# Altium PCB PCB4.PcbDoc
Units mm, origin at the board's own origin, x right, y up, seen from the top; angles counter-clockwise.
Board outline 75 x 75 mm, 2 copper layers (Top Layer, Bottom Layer); 69 components, 65 nets, 247 pads, 60 vias.
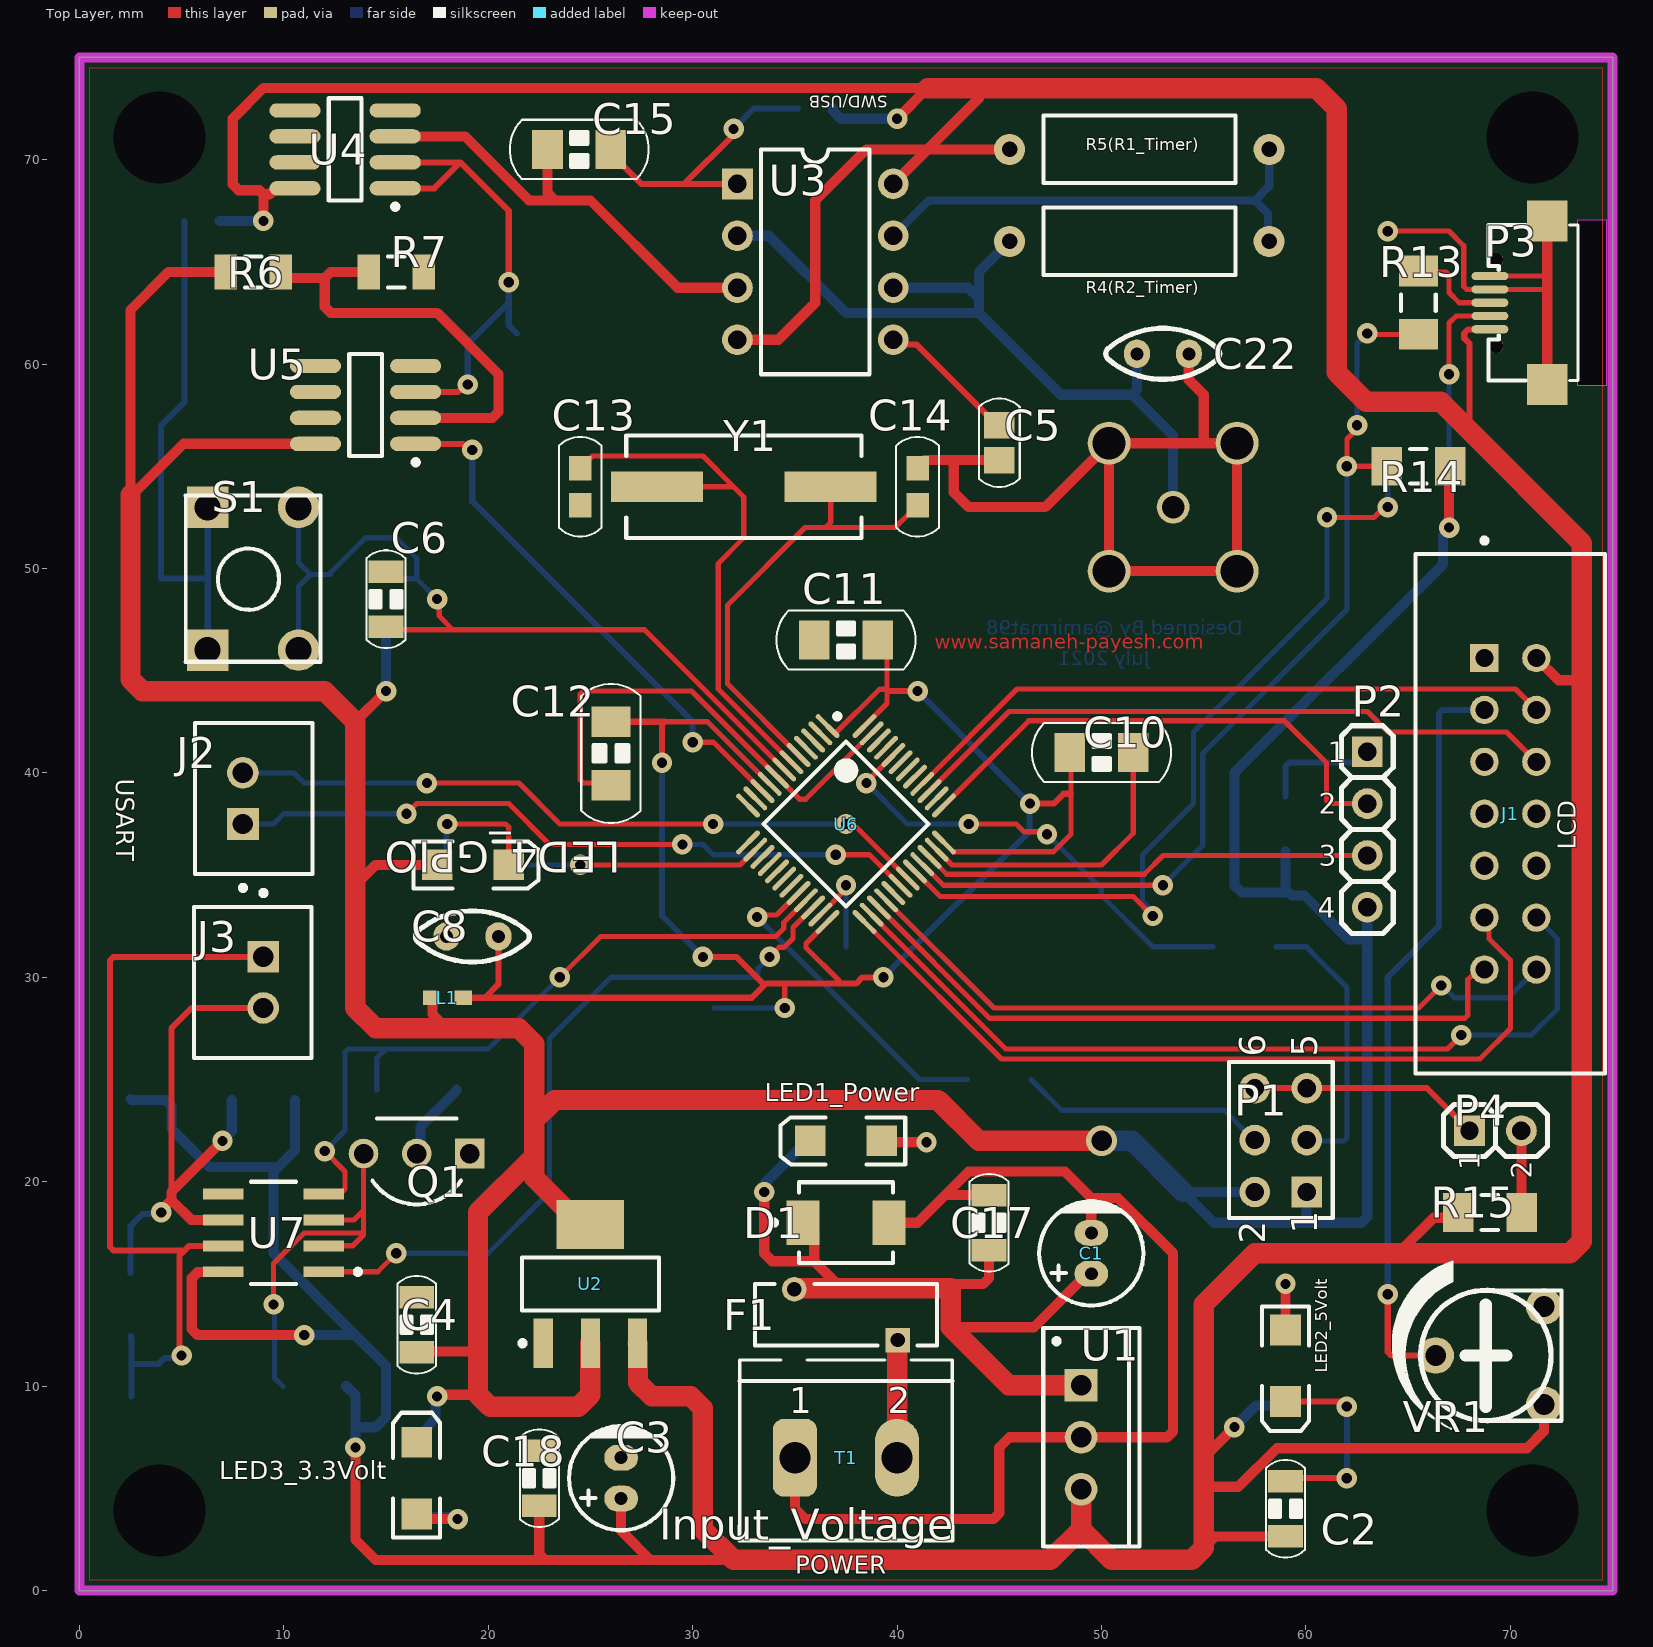
[diagram p0: Top Layer view]
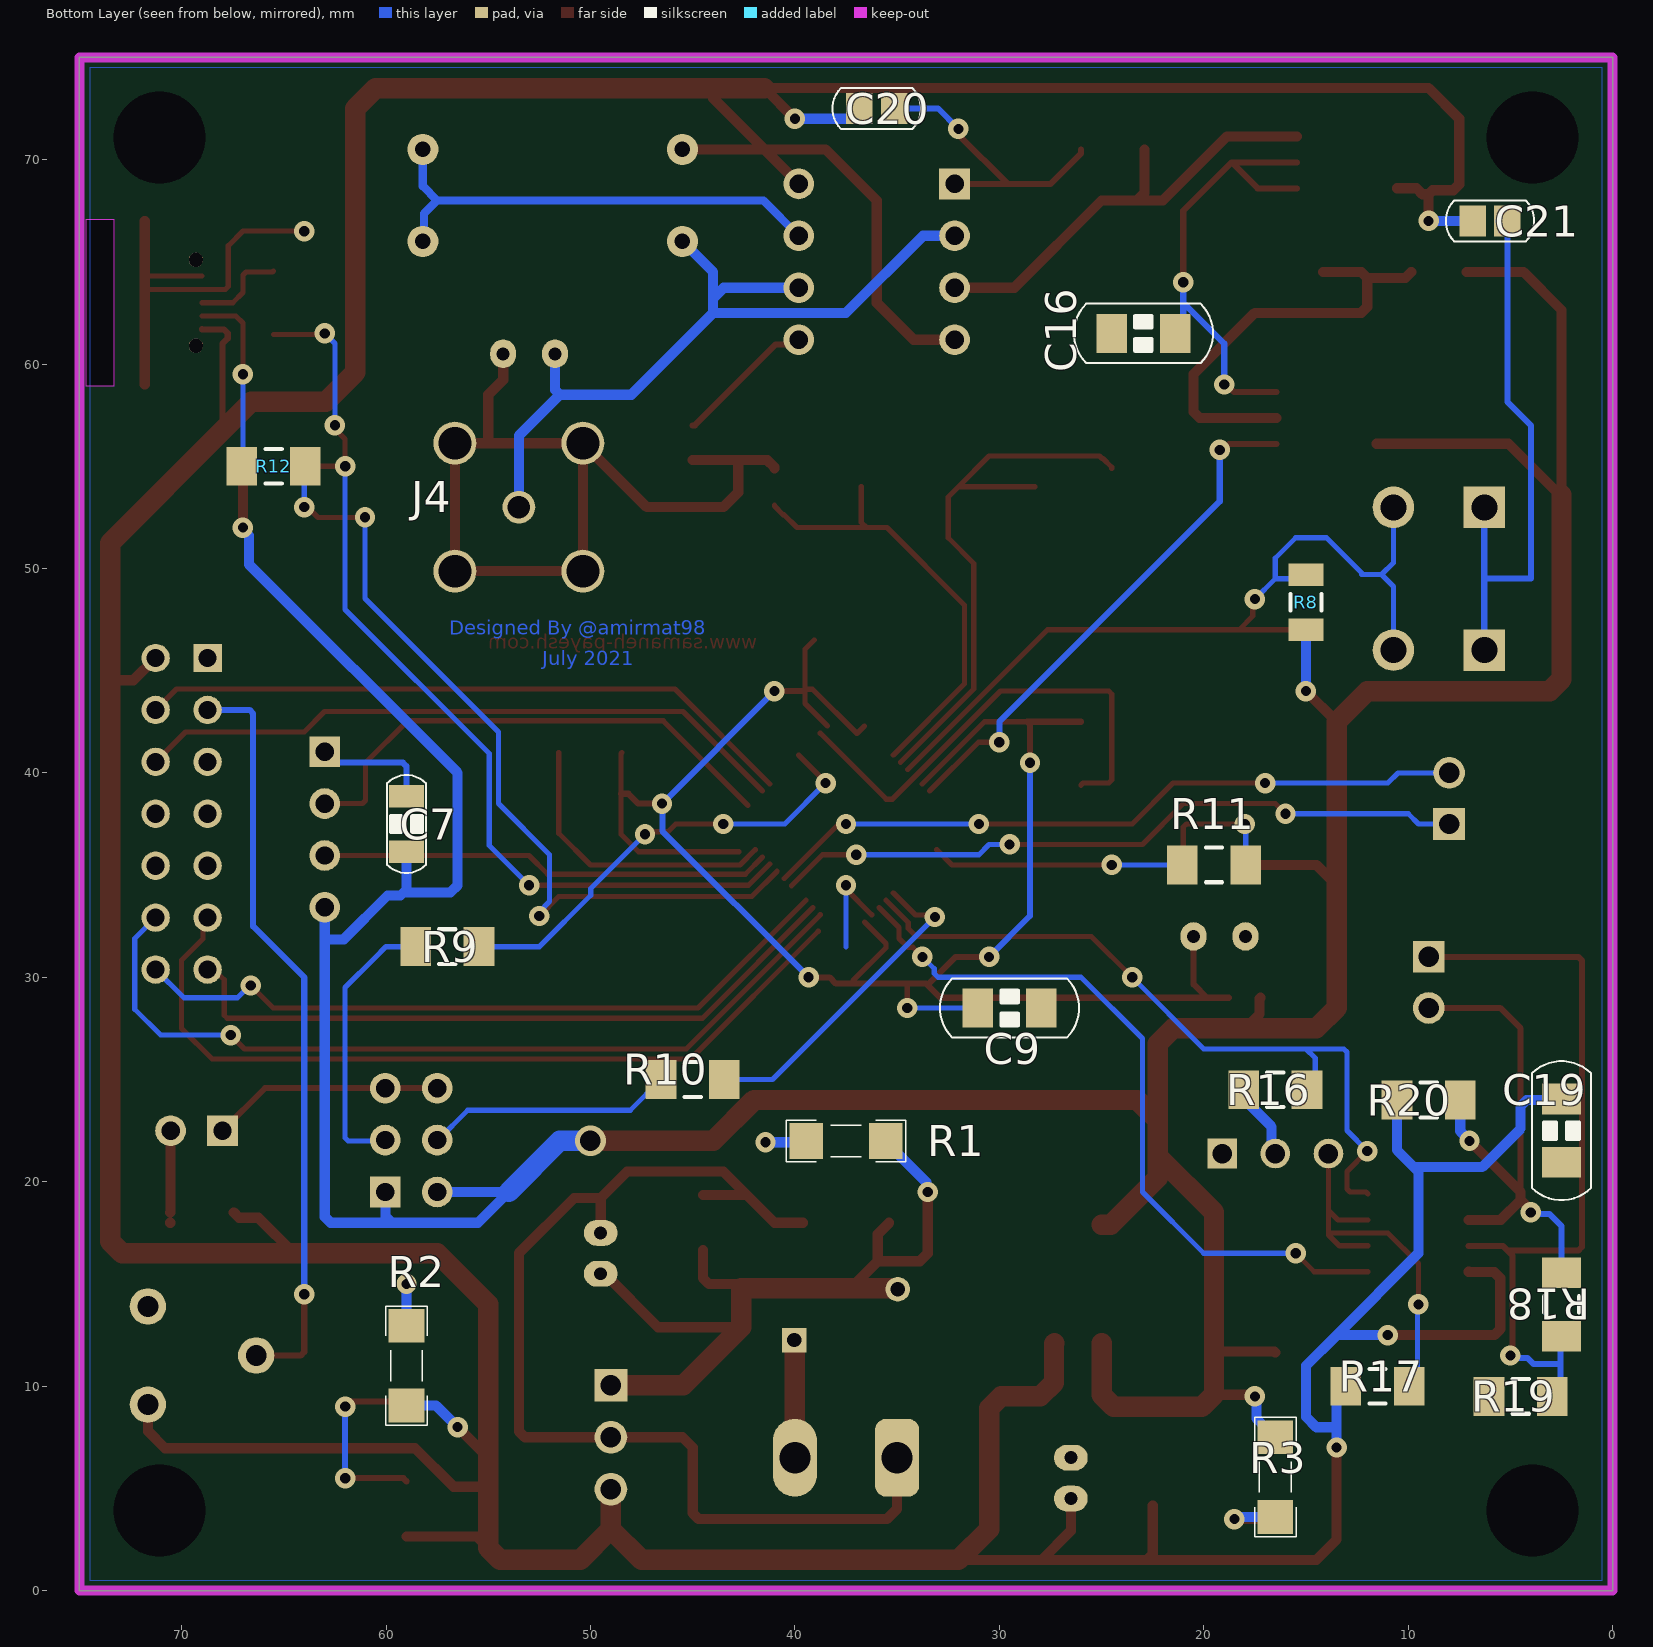
[diagram p1: Bottom Layer view, seen from below]

## Layer stack, top to bottom
Top Solder: solder mask 0.0102, Solder Resist, Dk 3.5
Top Layer: signal copper 0.0356
Dielectric 1: dielectric 0.32, FR-4, Dk 4.8
Bottom Layer: signal copper 0.0356
Bottom Solder: solder mask 0.0102, Solder Resist, Dk 3.5

## Board outline
0,0 75,0 75,75 0,75

## Design rules (kind name [scope] priority, off if disabled: settings)
BoardOutlineClearance [All] p1: gap=0.254 ignorepadtopadclearanceinfootprint=FALSE except(0: Arc-SplitContinuation Track-SplitContinuation SMDPad-SplitContinuation THPad-SplitContinuation Via-SplitContinuation Fill-SplitContinuation Poly-SplitContinuation Region-SplitContinuation Text-SplitContinuation)
Clearance Clearance_1 [InNamedPolygon('NONET_L01_P000') Or InNamedPolygon('NONET_L02_P001')] p1: gap=0.4 ignorepadtopadclearanceinfootprint=FALSE
Clearance [All] p2: gap=0.2 ignorepadtopadclearanceinfootprint=TRUE
HoleSize [All] p1: absolutevalues=TRUE maxlimit=5 minlimit=0.5 maxpercent=80.000 minpercent=20.000
HoleToHoleClearance [All] p1: gap=0.3 allowstackedmicrovias=TRUE
MinimumAnnularRing [All] p1: minimumring=0.2
MinimumSolderMaskSliver [All] p1: minsoldermaskwidth=0.3
PolygonConnect [All] p1: thpad.connectstyle=Relief thpad.reliefconductorwidth=0.254 thpad.reliefentries=4 thpad.polygonreliefangle="90 Angle" thpad.airgapwidth=0.254 smdpad.connectstyle=Relief smdpad.reliefconductorwidth=0.254 smdpad.reliefentries=4 smdpad.polygonreliefangle="90 Angle" smdpad.airgapwidth=0.254 via.connectstyle=Direct via.reliefconductorwidth=0.254 via.reliefentries=4 via.polygonreliefangle="90 Angle" via.airgapwidth=0.254
RoutingVias [All] p1: holewidth=0.5 width=1 viastyle="Through Hole" minholewidth=0.4 minwidth=0.8 maxholewidth=1.2 maxwidth=2
SolderMaskExpansion [All] p1: expansion=0.102 istentingtop=FALSE
UnRoutedNet [All] p1: checkbadconnections=TRUE
Width [All] p1: maxlimit=1 minlimit=0.254 preferedwidth=0.5
26 further rules are at their usual default settings.

## Classes and differential pairs
component class Timer555_D: C5 C15 C16 C20 C21 C22 J4 R4(R2_Timer) R5(R1_Timer) R6 R7 U3 U4 U5
component class Power_D: C1 C2 C3 C4 C17 C18 D1 F1 LED1_Power LED2_5Volt LED3_3.3Volt R1 R2 R3 T1 U1 U2
component class MCU_D: C6 C7 C8 C9 C10 C11 C12 C13 C14 C19 J2 J3 L1 LED4_GPIO P1 P2 P3 Q1 R8 R9 R10 R11 R12 R13 R14 R16 R17 R18 R19 R20 S1 U6 U7 Y1
component class LCD_D: J1 P4 R15 VR1

## Components (designator, comment, footprint, x,y, rotation, side; value= is the part's Value field where it differs from the comment)
C1 "1000uF" "cap 01" 49.5,16.5 r270 top
C2 "100nF" "CAPC3216L (1206)" 59,4 r90 top
C3 "4.7uF" "cap 01" 26.5,5.5 r270 top
C4 "100nF" "CAPC3216L (1206)" 16.5,13 r90 top
C5 "10nF" "CAPC2012N (0805)" 45,56.15 r90 top
C6 "1uF" "CAPC3216L (1206)" 15,48.5 r90 top
C7 "100nF" "CAPC3216L (1206)" 59,37.5 r90 bottom
C8 "1uF" "Cap - 100nF" 19.23,32 r180 top
C9 "100nF" "CAPC3216M (1206)" 29.5,28.5 r180 bottom
C10 "100nF" "CAPC3216M (1206)" 50,41 r0 top
C11 "100nF" "CAPC3216M (1206)" 37.5,46.5 r180 top
C12 "100nF" "CAPC3216M (1206)" 26,40.95 r270 top
C13 "20pF" "CAPC1608M (0603)" 24.5,54 r270 top
C14 "20pF" "CAPC1608M (0603)" 41,54 r90 top
C15 "1nF" "CAPC3216M (1206)" 24.45,70.5 r180 top
C16 "1uF" "CAPC3216M (1206)" 22.95,61.5 r0 bottom
C17 "100nF" "CAPC3216L (1206)" 44.5,18 r90 top
C18 "100nF" "CAPC3216L (1206)" 22.5,5.5 r90 top
C19 "100nF" "CAPC3216M (1206)" 2.5,22.5 r90 bottom
C20 "100nF" "CAPC2012N (0805)" 36,72.5 r180 bottom
C21 "100nF" "CAPC2012N (0805)" 6,67 r180 bottom
C22 "3.3nF" "Cap - 100nF" 53,60.5 r180 top
D1 "SM6T6V8A" STMicroelectronics_SM6T6V8A_0 37.5,18 r0 top
F1 "RUEF160" Littelfuse_RUEF160 37.5,13.5 r180 top
J1 "IDC Box Header 2x7" FT_IDCBH2x7 70,38 r90 top locked
J2 "B2B-XH-A_LF_SN" JST_0_MFG 8.525,38.75 r90 top
J3 "B2B-XH-A_LF_SN" JST_0_MFG 8.475,29.75 r270 top
J4 "5-1634503-1" TECO-5-1634503-1_V 53.5,53 r180 bottom
L1 "742792645 (Ferrite Bead)" SMD-0603 18,29 r0 top
LED1_Power "Green" "LED SMD 1206" 37.5,22 r180 top
LED2_5Volt "Green" "LED SMD 1206" 59,11 r270 top
LED3_3.3Volt "Green" "LED SMD 1206" 16.5,5.5 r90 top
LED4_GPIO "Green" "LED SMD 1206" 19.25,35.5 r0 top
P1 "HDR_3X2" MISC_HDR_2X3 60.04,19.5 r90 top
P2 "MaleHDR_1X04" MHDR1X04-254P 63,41.04 r270 top
P3 "USB Connector" USB_AB_BM_SHS 70.5,63 r270 top
P4 "MHDR_1X02" MHDR1X02-254P 68,22.5 r0 top
Q1 "2N3904TF" ON_Semiconductor_135AR_MFG 16.5,21 r90 top
R1 "1K" RESC4817X04N 37.5,22 r0 bottom
R2 "560" RESC4817X04N 59,11 r90 bottom
R3 "560" RESC4817X04N 16.5,5.55 r270 bottom
R4(R2_Timer) "330K" Res-(1/2) 58.2,66 r180 top
R5(R1_Timer) "100K" Res-(1/2) 58.2,70.5 r180 top
R6 "1K" "RESC3216X60L (1206)" 8.5,64.5 r180 top
R7 "2.2K" "RESC3216X60L (1206)" 15.5,64.5 r180 top
R8 "10K" "RESC3216X60L (1206)" 15,48.35 r270 bottom
R9 "100K" "RESC3216X60M (1206)" 57,31.5 r0 bottom
R10 "100K" "RESC3216X60M (1206)" 45,25 r180 bottom
R11 "560" "RESC3216X60M (1206)" 19.5,35.5 r0 bottom
R12 "20" "RESC3216X60M (1206)" 65.5,55 r0 bottom
R13 "20" "RESC3216X60M (1206)" 65.5,63 r90 top
R14 "4.7K" "RESC3216X60M (1206)" 65.5,55 r180 top
R15 "330" "RESC3216X60M (1206)" 69,18.5 r180 top
R16 "10K" "RESC3216X60M (1206)" 16.5,24.5 r0 bottom
R17 "10K" "RESC3216X60M (1206)" 11.5,10 r0 bottom
R18 "120" "RESC3216X60M (1206)" 2.5,14 r90 bottom
R19 "20K" "RESC3216X60M (1206)" 4.5,9.5 r180 bottom
R20 "20K" "RESC3216X60M (1206)" 9,24 r0 bottom
S1 "Switch PB" "Switch - Push to On" 8.5,49.5 r90 top
T1 "Input_Voltage" "MSTBV 2,5/2-G-5" 37.5,6.5 r0 top
U1 "L7805CV" "TO-220 AB" 49,7.5 r270 top
U2 "AMS1117-3.3" SOT223-4N 25,15 r90 top
U3 "NE555P" P008 36,65 r270 top
U4 "LMV358M" M08A_M 13,70.5 r180 top
U5 "LMV358M" M08A_M 14,58 r180 top
U6 "STM32F101C8T6" LQFP48_L 37.5,37.5 r315 top locked
U7 "MAX485ECSA+" Maxim_Integrated_S8-5_MFG 9.5,17.5 r180 top
VR1 "5K" "Pot 00" 69,11.5 r90 top
Y1 "8 MHz" "Crystal SMD" 32.5,54 r180 top

## Footprints (in the part's own frame and the unit in brackets; to place one, negate y for a bottom-side part, rotate by r counter-clockwise, add the part's x,y. Pads: shape width x height; smd on the part's side, far side on the other; paste and mask are expansions set on the pad)
"cap 01" [mm]
  oval 1.27x1.651 hole 0.635: 1(1,0) 2(-1,0)
  silkscreen extent -2.55,-2.55 2.55,2.55, body extent -2.53,-2.53 2.53,2.53, height 12.54
"Cap - 100nF" [mil]
  oval 50x55 hole 25: 1(-50,0) 2(50,0)
  silkscreen extent -110,-49 110,49, body extent -115,-34 115,33, height 272
"CAPC1608M (0603)" [mm] "Chip Capacitor, Body 1.6x0.8mm, IPC Low Density"
  rect 1.2x1.1 smd: 1(-0.9,0) 2(0.9,0)
  silkscreen extent -2.43,-1.05 2.43,1.05, body extent -0.76,-0.38 0.76,0.38, height 0.6
"CAPC2012N (0805)" [mm] "Chip Capacitor, Body 2.0x1.3mm, IPC Medium Density"
  rect 1.3x1.5 smd: 1(-0.85,0) 2(0.85,0)
  silkscreen extent -2.16,-1 2.16,1, body extent -1.02,-0.63 1.02,0.64, height 0.65
"CAPC3216L (1206)" [mm] "Chip Capacitor, Body 3.2x1.6mm, IPC High Density"
  rect 1.1x1.7 smd: 1(-1.35,0) 2(1.35,0)
  silkscreen extent -2.39,-0.95 2.39,0.95, body extent -1.52,-0.76 1.52,0.76, height 0.75
"CAPC3216M (1206)" [mm] "Chip Capacitor, Body 3.2x1.6mm, IPC Low Density"
  rect 1.5x1.9 smd: 1(-1.55,0) 2(1.55,0)
  silkscreen extent -3.4,-1.45 3.4,1.45, body extent -1.52,-0.76 1.52,0.76, height 0.75
"Crystal SMD" [mm] "DESIGNER ABBAS BASEREH"
  rect 4.5x1.5 smd: 1(-4.25,0) 2(4.25,0)
  silkscreen extent -5.75,-2.5 5.75,2.5, body extent -6.21,-2.25 6.09,2.25, height 5.18
FT_IDCBH2x7 [mil]
  rect 54.69x54.69 hole 35 paste-39370.1 mask+0: 1(300,50)
  round 54.69 hole 35 paste-39370.1 mask+0: 2(300,-50) 3(200,50) 4(200,-50) 5(100,50) 6(100,-50) 7(0,50) 8(0,-50) 9(-100,50) 10(-100,-50) 11(-200,50) 12(-200,-50) 13(-300,50) 14(-300,-50)
  silkscreen extent -500,-183 531,183, body extent -504,-186 504,186, height 10
JST_0_MFG [mm]
  rect 1.55x1.55 hole 1 paste-1000 mask+0: 1(-1.25,0.525)
  round 1.55 hole 1 paste-1000 mask+0: 2(1.25,0.525)
  silkscreen extent -4.5,-2.88 3.7,2.88, body extent -3.8,-2.98 3.8,2.98, height 0.25
"LED SMD 1206" [mm]
  rect 1.5x1.5 smd: 1(-1.75,0) 2(1.75,0)
  silkscreen extent -2.9,-1.15 3.2,1.15, body extent -1.65,-0.76 1.65,0.69, height 1.36
Littelfuse_RUEF160 [mm]
  rect 1.2x1.2 hole 0.7 paste-1000 mask+0: 1(-2.525,1.245)
  round 1.2 hole 0.7 paste-1000 mask+0: 2(2.525,-1.245)
  silkscreen extent -4.45,-1.5 4.45,1.5, body extent -4.55,-1.94 4.55,1.94, height 0.25
LQFP48_L [mm] "Thin QFP, 48-Leads, Body 7x7mm, Pitch 0.5mm, IPC High Density"
  oval 1.55x0.25 smd: 1(-4.025,2.75) 2(-4.025,2.25) 3(-4.025,1.75) 4(-4.025,1.25) 5(-4.025,0.75) 6(-4.025,0.25) 7(-4.025,-0.25) 8(-4.025,-0.75) 9(-4.025,-1.25) 10(-4.025,-1.75) 11(-4.025,-2.25) 12(-4.025,-2.75) 25(4.025,-2.75) 26(4.025,-2.25) 27(4.025,-1.75) 28(4.025,-1.25) 29(4.025,-0.75) 30(4.025,-0.25) 31(4.025,0.25) 32(4.025,0.75) 33(4.025,1.25) 34(4.025,1.75) 35(4.025,2.25) 36(4.025,2.75)
  oval 0.25x1.55 smd: 13(-2.75,-4.025) 14(-2.25,-4.025) 15(-1.75,-4.025) 16(-1.25,-4.025) 17(-0.75,-4.025) 18(-0.25,-4.025) 19(0.25,-4.025) 20(0.75,-4.025) 21(1.25,-4.025) 22(1.75,-4.025) 23(2.25,-4.025) 24(2.75,-4.025) 37(2.75,4.025) 38(2.25,4.025) 39(1.75,4.025) 40(1.25,4.025) 41(0.75,4.025) 42(0.25,4.025) 43(-0.25,4.025) 44(-0.75,4.025) 45(-1.25,4.025) 46(-1.75,4.025) 47(-2.25,4.025) 48(-2.75,4.025)
  silkscreen extent -4.15,-2.85 2.85,3.55, body extent -3.5,-3.5 3.5,3.5, height 1.6
M08A_M [mm] "SOIC, 8-Leads, Body 4.9x3.9mm, Pitch 1.27mm, IPC Low Density"
  oval 2.5x0.7 smd: 1(-2.45,1.905) 2(-2.45,0.635) 3(-2.45,-0.635) 4(-2.45,-1.905) 5(2.45,-1.905) 6(2.45,-0.635) 7(2.45,0.635) 8(2.45,1.905)
  silkscreen extent -2.58,-2.5 0.8,2.93, body extent -2,-2.5 2,2.5, height 1.75
Maxim_Integrated_S8-5_MFG [mm]
  rect 1.98x0.53 smd paste+0 mask+0: 1(-2.465,1.905) 2(-2.465,0.635) 3(-2.465,-0.635) 4(-2.465,-1.905) 5(2.465,-1.905) 6(2.465,-0.635) 7(2.465,0.635) 8(2.465,1.905)
  silkscreen extent -4.25,-2.5 1.1,2.5, body extent -3.55,-2.75 3.55,2.75, height 0.25
MHDR1X02-254P [mm] "Male Header 1X02 with 2.54 mm Pitch"
  rect 1.5x1.5 hole 0.9: 1(0,0)
  round 1.5 hole 0.9: 2(2.54,0)
  silkscreen extent -1.27,-1.27 3.81,1.27, body extent -1.27,-1.27 3.81,1.27, height 8.43
MHDR1X04-254P [mm] "Male Header 1X04 with 2.54 mm Pitch"
  rect 1.5x1.5 hole 0.9: 1(0,0)
  round 1.5 hole 0.9: 2(2.54,0) 3(5.08,0) 4(7.62,0)
  silkscreen extent -1.27,-1.27 8.89,1.27, body extent -1.27,-1.27 8.89,1.27, height 8.43
MISC_HDR_2X3 [mm] "Connector; Header; 3x2 Position"
  rect 1.5x1.5 hole 0.9: 1(0,0)
  round 1.5 hole 0.9: 2(0,2.54) 3(2.54,0) 4(2.54,2.54) 5(5.08,0) 6(5.08,2.54)
  silkscreen extent -1.27,-1.27 6.35,3.81, body extent -1.27,-1.27 6.35,3.81, height 8.38
"MSTBV 2,5/2-G-5" [mil] "Header, Nominal current: 12 A Rated voltage (III/2): 320 V Number of positions: 2 Pitch: 5mm Color: green Contact surface: Tin Assembly: Soldering DESIGNER:ABBAS BASEREH"
  rrect50% 85x150 hole 60: 1(-98.43,0)
  oval 85x150 hole 60: 2(98.43,0)
  silkscreen extent -205,-159 205,188, body extent -197,-152 197,187, height 473
ON_Semiconductor_135AR_MFG [mm]
  rect 1.45x1.45 hole 0.95 paste-1000 mask+0: 1(0.38,-2.6)
  round 1.45 hole 0.95 paste-1000 mask+0: 2(0.38,0) 3(0.38,2.6)
  silkscreen extent -2.1,-2.16 2.09,2.16, body extent -2.19,-3.42 2.19,3.42, height 0.25
P008 [mm] "DIP; 8 Leads; Row Spacing 7.62 mm; Pitch 2.54 mm"
  rect 1.5x1.5 hole 0.9: 1(-3.81,-3.81)
  round 1.5 hole 0.9: 2(-1.27,-3.81) 3(1.27,-3.81) 4(3.81,-3.81) 5(3.81,3.81) 6(1.27,3.81) 7(-1.27,3.81) 8(-3.81,3.81)
  silkscreen extent -5.5,-2.65 5.5,2.65
"Pot 00" [mil]
  round 70 hole 40: 1(-94.49,-104.33) 2(94.49,-104.33) 3(0,104.33)
  silkscreen extent -141,-138 181,187, body extent -125,-144 127,145, height 183
Res-(1/2) [mil]
  round 60 hole 30: 1(0,0) 2(500,0)
  silkscreen extent 65,-65 435,65, body extent -12,-66 513,66, height 135
"RESC3216X60L (1206)" [mm] "Chip Resistor, Body 3.2x1.6x0.60 mm, IPC High Density"
  rect 1.1x1.7 smd: 1(-1.35,0) 2(1.35,0)
  silkscreen extent -0.4,-0.75 0.4,0.75, body extent -1.6,-0.8 1.6,0.8, height 0.6
"RESC3216X60M (1206)" [mm] "Chip Resistor, Body 3.2x1.6x0.60mm, IPC Low Density"
  rect 1.5x1.9 smd: 1(-1.55,0) 2(1.55,0)
  silkscreen extent -0.4,-0.85 0.4,0.85, body extent -1.6,-0.8 1.6,0.8, height 0.6
RESC4817X04N [mm] "Chip Resistor, 2-Leads, Body 4/80x1/70mm, IPC Medium Density-Design:Abbas Basereh"
  rect 1.65x1.75 smd: 1(-1.95,0) 2(1.95,0)
  silkscreen extent -2.92,-1.02 2.92,1.02, body extent -1.6,-0.8 1.6,0.8, height 1
SMD-0603 [mm] "Chip Inductor, 2-Leads, Body 1.6x0.8mm"
  rect 0.85x0.7 smd: 1(-0.775,0) 2(0.775,0)
  body extent -0.8,-0.4 0.8,0.4, height 0.95
SOT223-4N [mm] "SOT223, 4-Leads, Body 6.7x7.3mm (max), Pitch 2.30mm, IPC Medium Density"
  rect 2.4x0.95 smd: 1(-2.9,2.3) 2(-2.9,0) 3(-2.9,-2.3)
  rect 2.4x3.3 smd: 4(2.9,0)
  silkscreen extent -3.02,-3.35 1.3,3.45, body extent -3.48,-3.25 3.48,3.25, height 1.68
STMicroelectronics_SM6T6V8A_0 [mm]
  rect 1.62x2.18 smd paste+0 mask+0: 1(-2.11,0) 2(2.11,0)
  silkscreen extent -3.65,-1.97 2.3,1.97, body extent -3.02,-2.07 3.02,2.07, height 0.25
"Switch - Push to On" [mil]
  rect 80x80 hole 50: 1(-137.5,87.5) 1(137.5,87.5)
  round 80 hole 50: 2(-137.5,-87.5) 2(137.5,-87.5)
  silkscreen extent -160,-130 160,130, body extent -155,-121 157,123, height 205
TECO-5-1634503-1_V [mm] "THD, 5-Leads,Dia 11mm, Pitch 3.13mm"
  round 1.6 hole 1.1: 1(0,0)
  round 2.1 hole 1.6: 2(-3.13,3.13) 3(-3.13,-3.13) 4(3.13,-3.13) 5(3.13,3.13)
  body extent -5.5,-5.51 5.5,5.51, height 13.7
"TO-220 AB" [mm] "Epoxy meets UL94, V0-Design:Abbas Basereh"
  rect 1.6x1.6 hole 1: 1(-2.54,0)
  round 1.6 hole 1: 2(0,0) 3(2.54,0)
  silkscreen extent -5.35,-1.85 5.35,2.85, body extent -5.08,-1.65 5.08,2.92, height 18.54
USB_AB_BM_SHS [mm] "USB Micro AB - Standard (Bottom mount), Shell SMT DESIGNER ABBAS BASEREH"
  oval 0.4x1.8 smd: 1(1.3,-1.5) 2(0.65,-1.5) 3(0,-1.5) 4(-0.65,-1.5) 5(-1.3,-1.5)
  rect 2x2 smd: 6(-4,1.3) 6(4,1.3)
  round 0.7 hole 0.7: H(-2.1,-1.2) H(2.1,-1.2)
  Keep-Out Layer board cut-out: -4.064,2.8 -4.064,4.191 4.064,4.191 4.064,2.8
  silkscreen extent -3.8,-1.57 3.8,2.8, body extent -4,-1.88 4,4.16, height 2.75

## Part data
C1 C3: library part CAP_Polar, "Polar Capacitor"
C2 C4 C5 C6 C7 C8 C9 C10 C11 C12 C13 C14 C15 C16 C17 C18 C19 C20 C21: library part CAP_Bipolar, "Bipolar Capacitor"
C22: library part Cap-Bipolar, "Bipolar Capacitor"
D1: "TVS DIODE 5.8VWM 13.4VC SMB"
F1: "Littelfuse RUEF160----PTC Resettable Fuse 1.6A(hold) 3.2A(trip) 30V 100A 0.9W 8s 0.03Ohm Radial 8.9 X 3 X 15.2mm Bag"
J4: "Female Header, Pitch 3.13 mm, Height 13.7 mm, Tail Length 4.5 mm, -55 to 85 degC, RoHS, Bulk"
L1: library part 742792645, "SMD EMI Suppression Ferrite Bead WE-CBF, Z = 470 Ohm"
LED1_Power LED2_5Volt LED3_3.3Volt: library part LED
LED4_GPIO: library part LED, "LED"
P1: "Header, 3-Pin, Dual row"
P2: library part MHDR_1X04, "Male Header 1X04"
P3: library part "USB AB MICRO CONNECTOR", "USB MICRO-B Type Connector"
P4: "Male Header 1X02"
R1 R2 R3: library part "RES 1206 0.25W", "RES 1206"
R4(R2_Timer) R5(R1_Timer) R6 R7 R8 R9 R10 R11 R12 R13 R14 R15 R16 R17 R18 R19 R20: library part RES, "Resistor"
S1: "Push Button Switch"
T1: library part CON_Phoenix_MSTBV_02, "2 Pitch: 5 mm Color: green Contact surface: Tin Assembly"
U1: library part "L7805CV-Linear Voltage Regulator IC Positive 1 Output 5V 1.5A TO-220AB", "Linear Voltage Regulator IC Positive FIXED"
U2: library part IC_AMS1117-3.3, "800mA LOW DROPOUT VOLTAGE REGULATOR"
U3: "Precision Timer"
U4 U5: "General Purpose, Low Voltage, Rail-to-Rail Output Operational Amplifiers, 8-pin Narrow SOIC"
U6: "STM32 ARM-based 32-bit MCU with 64 Kbytes Flash, 48-pin LQFP, Industrial Temperature"
VR1: library part "Resistor Variable", "Variable Resistor"
Y1: library part XTAL_Crystal, "XTAL Crystal"

## Free pads (board coordinates)
  round 1.524 hole 4.5: M4(3.91,3.91) M4(3.91,71.09) M4(71.09,3.91) M4(71.09,71.09)

## Via types
v1: diameter 1, hole 0.5, Top Layer to Bottom Layer, 59 vias
v2: diameter 1.5, hole 1, Top Layer to Bottom Layer, 1 vias

## Nets (pads, with @x,y where several pads share a name; then routed paths per layer and width w, separated by ;. In a path a pad name is that pad's centre, name@x,y a point inside that pad or via, vN(x,y) a via of type N, cw(c..) or ccw(c..) an arc to the next point about the centre after c; other vN are vias at no path point)
+3.3V: C4.1 C7.1 L1.1 LED4_GPIO.1 P1.1 P1.2 P2.4 R3.1 R6.2 R8.2 R14.1 U2.2 U2.4 U5.8 | length 217.9
  Top Layer w0.5: R6.2 4.356,64.5 2.5,62.644 2.5,53.615 2.615,53.615 5.095,56.095 U5.8 ; 13.5,34.5 14.5,35.5 LED4_GPIO.1 ; 13.5,42.5 v1(15,44) ; C4.1 16.546,11.696 19.5,11.696 ; L1.1 17.269,28.956 17.269,28.209 17.978,27.5 ; v1(17.5,9.5) 17.586,9.586 19.5,9.586 ; v1(67,52) 67,54.95 R14.1
  Top Layer w1: 2.5,53.615 2.5,44.586 3.086,44 12,44 13.5,42.5 13.5,34.5 13.5,28.5 14.5,27.5 17.978,27.5 21.5,27.5 22.25,26.75 22.25,23.001 ; U2.2 25,9.586 24.414,9 20.086,9 19.5,9.586 19.5,11.696 19.5,18.5 22.25,21.25 ; U2.4 24.55,17.9 22.25,20.2 22.25,21.25 ; v2(50,22) 44,22 42,24 23.249,24 22.25,23.001 ; 22.25,21.25 22.25,23.001
  Bottom Layer w0.5: v1(15,44) R8.2 ; R3.1 16.55,7.5 17.125,8.075 17.125,8.125 17.423,8.423 17.423,9.423 v1(17.5,9.5) ; P1.2 54,19.5 55.5,18 59.727,18 ; C7.1 59,34.293 59.146,34.146 ; P1.1 60.02,19.48 60.02,18.293 59.727,18 ; P2.4 63,31.853 ; v1(67,52) 67,51.892 66.707,51.599 66.707,50.207 56.5,40 56.5,34.5 56.854,34.146 59.146,34.146 ; 59.146,34.146 59.293,34 59.927,34 62.073,31.853 63,31.853 ; 59.727,18 62.707,18 63,18.293 63,31.853
  Bottom Layer w1: v2(50,22) 51.5,22 54,19.5
+5V: C2.1 C3.1 C18.1 C19.2 C20.1 C21.1 J1.2 P3.1 R2.1 R5(R1_Timer).2 R15.2 R17.2 R20.2 U1.3 U2.3 U3.4 U3.8 U4.8 U7.8 VR1.1 | length 346.7
  Top Layer w0.3: 67.929,56.811 68,56.883 68,61 67.743,61.257 67.743,61.505 67.919,61.681 68.981,61.681 P3.1
  Top Layer w0.5: U7.8 7.02,15.58 5.793,15.58 5.5,15.287 5.5,12.793 5.793,12.5 v1(11,12.5) ; v1(9,67) 9,68.302 ; U4.8 9.596,68.595 9.303,68.302 9,68.302 ; v1(13.5,7) 13.5,2.5 14.5,1.5 22.793,1.5 ; C18.1 22.5,1.793 22.793,1.5 ; C3.1 26.5,2.923 27.923,1.5 ; 32,1.5 27.923,1.5 ; U3.4 34.19,61.19 36,63 36,68 38.5,70.5 41.5,70.5 ; U3.8 41.5,70.5 ; v1(40,72) 41.5,73.5 9,73.5 7.5,72 7.5,68.793 7.793,68.5 8.802,68.5 9,68.302 ; 44,73.5 44,73 41.5,70.5 ; 45.5,70.5 41.5,70.5 ; 55,2.086 55.564,2.65 C2.1 ; 55,5.079 56.693,5.079 58.582,6.968 70.814,6.968 71.639,7.793 71.639,9.089 VR1.1 ; 55,6.895 55.395,6.895 v1(56.5,8) ; 64.5,16.5 66.243,18.243 67.193,18.243 R15.2 ; J1.2 72.357,44.533 73.5,44.533 ; 22.793,1.5 27.923,1.5
  Top Layer w1: U2.3 27.325,12.075 27.325,10.175 28,9.5 29.914,9.5 30.5,8.914 30.5,3 32,1.5 47.5,1.5 49,3 ; 41.5,73.5 44,73.5 60.5,73.5 61.5,72.5 61.5,59.586 62.936,58.15 66.59,58.15 67.929,56.811 73.5,51.24 73.5,44.533 73.5,17.086 72.914,16.5 64.5,16.5 57.5,16.5 55,14 55,6.895 55,5.079 55,2.086 54.414,1.5 50.5,1.5 49,3 ; U1.3 49,3
  Bottom Layer w0.5: C19.2 2.55,24 4.207,24 4.5,23.707 4.5,22.6 6.384,20.716 9.716,20.716 ; C21.1 v1(9,67) ; R20.2 10.55,21.55 9.716,20.716 ; v1(11,12.5) 13.5,12.5 ; R17.2 13.5,9.55 13.5,7.988 ; v1(13.5,7) 13.5,7.988 ; C20.1 36.85,72.4 37.25,72 v1(40,72) ; v1(56.5,8) 57.55,9.05 R2.1 ; 9.716,20.716 9.5,20.5 9.5,16.5 13.5,12.5 ; 13.5,7.988 14.488,7.988 15,8.5 15,11 13.5,12.5
BOOT0: R9.1 U6.44 | length 22.4
  Top Layer w0.254: v1(38.5,39.5) 38.5,39.558 39.816,40.874 U6.44 ; v1(43.5,37.5) 45.825,37.5 46.202,37.124 47.213,37.124 v1(47.333,37.003)
  Bottom Layer w0.254: v1(38.5,39.5) 40.5,37.5 v1(43.5,37.5) ; v1(47.333,37.003) 49.988,34.348 49.988,34.012 52.5,31.5 R9.1
BOOT1: R10.2 U6.20 | length 16.1
  Top Layer w0.254: v1(33.15,32.95) 33.25,33.05 34.108,33.05 35.181,34.124 U6.20
  Bottom Layer w0.254: v1(33.15,32.95) 41.099,25 R10.2
Buffer_OUTPUT: C16.1 U4.1 U4.2 U5.3 | length 23.9
  Top Layer w0.3: U4.1 17.365,68.595 18.635,69.865 ; U4.2 18.635,69.865 ; U5.3 18.527,58.635 18.892,59 v1(19,59) ; v1(21,64) 21,67.5 18.635,69.865
  Bottom Layer w0.3: v1(19,59) 19,61 21,63 ; v1(21,64) 21,63 ; C16.1 21,61.9 21,63
GND: C1.2 C2.2 C3.2 C4.2 C5.1 C6.2 C7.2 C8.2 C9.2 C10.2 C11.2 C12.2 C13.2 C14.2 C15.1 C16.2 C17.2 C18.2 C19.1 C20.2 C21.2 C22.1 D1.2 J1.1 J1.5 J4.2 J4.3 J4.4 J4.5 LED1_Power.2 LED2_5Volt.2 LED3_3.3Volt.2 P1.5 P1.6 P2.1 P3.4 P3.5 P3.6 P4.1 Q1.1 R7.1 R19.1 S1.1 T1.1 U1.2 U2.1 U3.1 U4.4 U5.4 U6.8 U6.23 U6.35 U6.47 U7.5 VR1.2 | length 231.1
  Top Layer w0.254: C12.2 25.9,39.5 24.649,39.5 24.5,39.649 24.5,43.851 24.649,44 29.939,44 U6.8 35.224,38.715 35.533,38.715 U6.47 ; U6.23 37.5,34.318 v1(37.5,34.5) ; U6.35 42.682,35.5 50,35.5 51.55,37.05 C10.2 ; v1(64,66.5) 67,66.5 67.719,65.781 67.719,63.799 67.867,63.65 P3.4 71.781,63.65 71.8,63.631 ; P3.5 71.774,64.3
  Top Layer w0.3: C15.1 26,70.3 27.49,68.81 29.592,68.81 ; v1(32,71.5) 32,71.218 29.592,68.81 ; U3.1 29.592,68.81 ; P1.6 P1.5 65.92,24.58 P4.1 ; C2.2 59.15,5.5 v1(62,5.5) ; LED2_5Volt.2 61.75,9.25 v1(62,9)
  Top Layer w0.5: T1.1 35,4 35.5,3.5 44.707,3.5 45,3.793 45,7 45.5,7.5 U1.2 53.207,7.5 53.5,7.793 53.5,16.5 50.793,19.207 49.5,19.207 ; D1.2 41,18 42.35,19.35 ; C14.2 41,54.95 41.35,55.3 42.77,55.3 ; C17.2 42.35,19.35 ; C5.1 42.77,55.3 ; C1.2 49.5,19.207 ; C22.1 54.27,59.23 55,58.5 55,56.187 54.943,56.13 ; 71.774,64.3 71.8,64.274 ; P3.6@71.8,59 71.8,63.631 71.8,64.274 ; P3.6@71.8,67 71.8,64.274 ; 42.35,19.35 43.5,20.5 48.207,20.5 49.5,19.207 ; 42.77,55.3 42.77,53.73 43.5,53 47.24,53 J4.5 ; J4.5 54.943,56.13 ; J4.5 J4.4 J4.3 J4.2 54.943,56.13
  Bottom Layer w0.254: 37.5,31.5 v1(37.5,34.5)
  Bottom Layer w0.3: C21.2 5.15,58.15 4,57 4,49.5 6.278,49.5 ; S1.1@6.278,46.008 6.278,49.5 ; S1.1@6.278,52.993 6.278,49.5 ; v1(32,71.5) 33,72.5 C20.2 ; C7.2 59,40.324 59.176,40.5 62.46,40.5 P2.1 ; v1(62,5.5) v1(62,9)
NE555_OUTPUT: C15.2 U3.3 U4.3 | length 22.5
  Top Layer w0.5: U4.3 18.865,71.135 22,68 23.279,68 ; C15.2 22.9,68.379 23.279,68 ; U3.3 29.27,63.73 25,68 23.279,68
NetC1_1: C1.1 C17.1 D1.1 F1.2 R1.1 U1.1 | length 41.5
  Top Layer w0.5: v1(33.5,19.5) 33.5,16.5 33.89,16.11 35.95,16.11 ; D1.1 35.95,17.44 35.95,16.11 ; 37.277,14.783 35.95,16.11 ; 42.615,12.885 46.695,12.885 49.31,15.5 C1.1 ; 42.615,14.783 42.832,15 44.207,15 44.5,15.293 C17.1
  Top Layer w1: F1.2 35.013,14.783 37.277,14.783 42.615,14.783 42.615,12.885 45.46,10.04 U1.1
  Bottom Layer w0.5: v1(33.5,19.5) 33.577,19.577 33.577,19.977 35.55,21.95 R1.1
NetC5_2: C5.2 U3.5 | length 6.9
  Top Layer w0.3: U3.5 40.04,60.96 40.94,60.96 44.9,57 C5.2
NetC8_1: C8.1 C9.1 C10.1 C11.1 C12.1 L1.2 U6.1 U6.9 U6.24 U6.36 U6.48 | length 100
  Top Layer w0.254: 28.633,42.5 30.732,42.5 U6.9 ; v1(34.5,28.5) 34.5,29.693 ; U6.24 35.55,31.661 35.55,31.45 37.153,29.847 37.153,29.693 ; U6.1 36.967,41.922 36.97,41.922 39.141,44.094 39.5,44.094 ; U6.48 39.5,43.389 39.5,44.094 ; C11.1 39.5,46.05 39.5,44.094 ; U6.36@42.75,36.142 42.753,36.142 42.754,36.143 47.643,36.143 48.5,37 48.5,38.977 48.5,40.95 C10.1
  Top Layer w0.3: L1.2 19.841,29 ; C8.1 20.5,29.659 19.841,29 ; C12.1 28.633,42.5 28.5,42.367 v1(28.5,40.5) ; v1(30.5,31) 32.138,31 33.445,29.693 33.445,29.555 ; v1(39.33,30) 38.3,30 37.993,29.693 37.153,29.693 34.5,29.693 33.582,29.693 33.445,29.555 ; 39.5,44.094 39.594,44 v1(41,44) ; v1(46.5,38.5) 47.662,38.5 48.14,38.977 48.5,38.977 ; 19.841,29 32.889,29 33.445,29.555
  Bottom Layer w0.254: C9.1 v1(34.5,28.5)
  Bottom Layer w0.3: v1(28.5,40.5) 28.5,33 v1(30.5,31) ; v1(39.33,30) 46.483,37.154 46.483,38.483 v1(46.5,38.5) v1(41,44)
NetC22_2: C22.2 J4.1 R4(R2_Timer).2 U3.2 U3.6 | length 39.5
  Bottom Layer w0.5: U3.2 33.73,66.27 37.5,62.5 44,62.5 ; U3.6 43.477,63.73 44,63.207 ; 45.5,66 44,64.5 44,63.207 ; C22.2 51.73,58.73 51.5,58.5 ; J4.1 53.5,56.5 51.5,58.5 ; 44,62.5 48,58.5 51.5,58.5 ; 44,62.5 44,63.207
NetJ1_3: J1.3 VR1.3 | length 37
  Top Layer w0.3: v1(64,14.5) 64,11.676 64.176,11.5 VR1.3
  Bottom Layer w0.3: v1(64,14.5) 64,30 66.5,32.5 66.5,42.904 66.676,43.08 J1.3
NetJ3_1: J3.1 R18.1 R19.2 U7.7 | length 38.2
  Top Layer w0.3: v1(5,11.5) 4.9,11.6 4.9,16.4 5.133,16.633 ; U7.7 5.365,16.865 5.133,16.633 ; J3.1 1.676,31 1.5,30.824 1.5,16.808 1.676,16.633 5.133,16.633
  Bottom Layer w0.3: R18.1 2.55,12.4 2.55,11.087 ; R19.2@2.55,9.5 2.55,11.087 ; v1(5,11.5) 4.885,11.385 4.172,11.385 3.874,11.087 2.55,11.087
NetJ3_2: J3.2 R18.2 R20.1 U7.6 | length 26.8
  Top Layer w0.3: 4.5,19.5 4.5,27.5 5.5,28.5 J3.2
  Top Layer w0.5: v1(4,18.5) 4,18.608 4.5,19.108 ; v1(7,22) 4.5,19.5 4.5,19.108 ; U7.6 5.473,18.135 4.5,19.108
  Bottom Layer w0.3: R18.2 2.5,17.824 3.1,18.424 3.924,18.424 v1(4,18.5)
  Bottom Layer w0.5: v1(7,22) 7,22.028 7.45,22.478 R20.1
NetLED1_Power_1: LED1_Power.1 R1.2 | length 4.2
  Top Layer w0.5: LED1_Power.1 39.313,21.937 v1(41.437,21.937)
  Bottom Layer w0.5: R1.2 39.513,21.937 v1(41.437,21.937)
NetLED2_5Volt_1: LED2_5Volt.1 R2.2 | length 4.3
  Top Layer w0.5: LED2_5Volt.1 v1(59,15)
  Bottom Layer w0.5: R2.2 v1(59,15)
NetLED3_3.3Volt_1: LED3_3.3Volt.1 R3.2 | length 4.1
  Top Layer w0.5: LED3_3.3Volt.1 16.75,3.5 v1(18.5,3.5)
  Bottom Layer w0.5: R3.2 18.4,3.6 v1(18.5,3.5)
NetLED4_GPIO_2: LED4_GPIO.2 R11.1 | length 6.9
  Top Layer w0.254: v1(18,37.5) 20.851,37.5 21,37.351 LED4_GPIO.2
  Bottom Layer w0.254: R11.1 17.95,37.45 v1(18,37.5)
NetP1_3: P1.3 R9.2 | length 13.7
  Bottom Layer w0.254: R9.2 60,31.5 60.546,30.954 62,29.5 62,22.149 61.851,22 60.08,22 P1.3
NetP1_4: P1.4 R10.1 | length 12.2
  Bottom Layer w0.254: R10.1 48.05,23.5 56,23.5 57.46,22.04 P1.4
NetP3_2: P3.2 R12.2 | length 9.2
  Top Layer w0.254: v1(67,59.5) 67,62 67.35,62.35 P3.2
  Bottom Layer w0.254: v1(67,59.5) 67,55.05 R12.2
NetP3_3: P3.3 R13.2 | length 4.6
  Top Layer w0.254: R13.2 65.55,64.5 66.851,64.5 67,64.351 67,63.5 67.5,63 P3.3
NetP4_2: P4.2 R15.1 | length 4
  Top Layer w0.5: R15.1@70.54,18.01 R15.1@70.55,18 ; P4.2 70.54,18.51 R15.1
NetQ1_2: Q1.2 R16.2 | length 3.9
  Bottom Layer w0.5: Q1.2 16.682,21.562 16.682,22.682 18.45,24.45 R16.2@18.45,24.5
NetQ1_3: Q1.3 R17.1 U7.2 U7.3 | length 19.5
  Top Layer w0.254: v1(9.5,14) 9.5,16 11,17.5 13.8,17.5 13.9,17.4 ; U7.2 13.365,16.865 13.9,17.4 ; U7.3 13.435,18.135 13.9,18.6 ; Q1.3 13.9,18.6 ; 13.9,17.4 13.9,18.6
  Bottom Layer w0.254: v1(9.5,14) 9.55,13.95 9.55,10.4 R17.1
NetR4(R2_Timer)_1: R4(R2_Timer).1 R5(R1_Timer).1 U3.7 | length 23.5
  Bottom Layer w0.4: U3.7 41.54,68 57.5,68 ; 58.2,66 58.138,66.062 58.138,67.362 57.5,68 ; 58.2,70.5 58.2,68.7 57.5,68
NetR6_1: R6.1 R7.2 U5.2 | length 21.8
  Top Layer w0.5: R6.1 10.143,64.207 12,64.207 ; R7.2 12.293,64.5 12,64.207 ; U5.2 20.207,57.365 20.5,57.658 20.5,59.5 17.5,62.5 12.293,62.5 12,62.793 12,64.207
OSCIN: C14.1 U6.5 Y1.1 | length 22.2
  Top Layer w0.254: U6.5 31.704,44.357 31.704,48.204 35.5,52 36.5,52 ; Y1.1 36.75,52.25 36.5,52 ; C14.1 41,53.05 40.577,52.627 40.527,52.627 39.9,52 36.5,52
OSCOUT: C13.1 U6.6 Y1.2 | length 27.8
  Top Layer w0.254: C13.1 24.5,54.95 24.923,55.373 24.973,55.373 25.1,55.5 30.5,55.5 32,54 ; Y1.2 32,54 ; U6.6 31.25,44.104 31.25,50.25 32.5,51.5 32.5,53.5 32,54
PA0: U5.1 U6.10 | length 26.1
  Top Layer w0.254: v1(30,41.5) 31.025,41.5 U6.10
  Top Layer w0.3: U5.1 18.757,56.095 19.055,55.798 v1(19.217,55.798)
  Bottom Layer w0.3: v1(19.217,55.798) 19.217,53.283 30,42.5 v1(30,41.5)
PA1: U6.11
PA2: U6.12
PA3: U6.13
PA4: R11.2 U6.14 | length 12.3
  Top Layer w0.254: v1(24.5,35.5) 32.318,35.5 U6.14
  Bottom Layer w0.254: R11.2 v1(24.5,35.5)
PA5: U6.15
PA6: U6.16
PA7: U6.17
PA8: U6.29
PA9: J2.1 U6.30 | length 34.2
  Top Layer w0.254: v1(16,38) 16.5,38.5 21,38.5 23,36.5 v1(29.5,36.5) ; v1(37,36) 38.646,36 U6.30
  Bottom Layer w0.254: J2.1 9.5,37.5 10,38 v1(16,38) ; v1(29.5,36.5) 30.5,36.5 31,36 v1(37,36)
PA10: J2.2 U6.31 | length 34.7
  Top Layer w0.254: v1(17,39.5) 21.5,39.5 23.5,37.5 v1(31,37.5) ; v1(37.5,37.5) 37.854,37.5 U6.31
  Bottom Layer w0.254: J2.2 10.5,40 11,39.5 v1(17,39.5) ; v1(31,37.5) v1(37.5,37.5)
PA11: R12.1 U6.32 | length 41.2
  Top Layer w0.254: U6.32 42.11,33.951 51.549,33.951 v1(52.5,33) ; v1(61.028,52.5) 63.325,52.5 63.825,53 v1(64,53)
  Bottom Layer w0.254: v1(52.5,33) 52.5,33.202 52,33.702 52,36 54.5,38.5 54.5,42 61.028,48.528 v1(61.028,52.5) ; R12.1 64,54.95 v1(64,53)
PA12: R13.1 R14.2 U6.33 | length 47.8
  Top Layer w0.254: U6.33 42.268,34.5 v1(53,34.5) ; v1(62.5,57) 62.5,56.825 62,56.325 v1(62,55) R14.2 ; v1(63,61.5) 63.05,61.45 R13.1
  Bottom Layer w0.254: v1(53,34.5) 54.954,36.454 54.954,40.954 62,48 v1(62,55) ; v1(62.5,57) 62.5,61 v1(63,61.5)
PA15: U6.38
PB0: U6.18
PB1: U6.19
PB3: J1.6 U6.39 | length 32.3
  Top Layer w0.254: U6.39 45.475,43 63.002,43 64.002,42 69.81,42 J1.6
PB4: J1.4 U6.40 | length 32.4
  Top Layer w0.254: U6.40 45.869,44.101 70.249,44.101 J1.4
PB5: U6.41
PB6: U6.42
PB7: U6.43
PB8: U6.45
PB9: U6.46
PB10: R16.1 U6.21 U7.4 | length 36.6
  Top Layer w0.254: U7.4 12.06,19.5 12.851,19.5 13,19.649 13,20.5 v1(12,21.5) ; v1(23.5,30) 25.5,32 34.066,32 34.451,32.385 34.451,32.683 U6.21
  Bottom Layer w0.254: v1(12,21.5) 13,22.5 13,26.351 13.149,26.5 15,26.5 ; R16.1@14.55,24.5 14.55,26.05 15,26.5 ; v1(23.5,30) 20,26.5 15,26.5
PB11: U6.22 U7.1 | length 36.1
  Top Layer w0.254: U7.1 14.595,15.595 v1(15.5,16.5) ; v1(33.762,31) 34.233,31.471 34.471,31.471 34.905,31.905 34.905,32.43 U6.22
  Bottom Layer w0.254: v1(15.5,16.5) 20,16.5 23,19.5 23,27 26,30 33,30 33.18,30.18 33.18,30.417 v1(33.762,31)
PB12: J1.11 U6.25 | length 40.3
  Top Layer w0.254: U6.25@38.86,32.251 45.111,26 68.5,26 70,27.5 70,30.835 68.947,31.888 68.947,32.703 J1.11
PB13: J1.12 U6.26 | length 42
  Top Layer w0.254: U6.26 45.318,26.5 66.925,26.5 v1(67.598,27.173)
  Bottom Layer w0.254: v1(67.598,27.173) 71.024,27.173 72.291,28.44 72.291,31.899 J1.12
PB14: J1.13 U6.27 | length 33.9
  Top Layer w0.254: U6.27 44.525,28 67.769,28 67.917,28.149 67.917,29.882 68.066,30.031 68.074,30.031 68.423,30.38 J1.13
PB15: J1.14 U6.28 | length 35.3
  Top Layer w0.254: U6.28 44.732,28.5 65.517,28.5 v1(66.616,29.599)
  Bottom Layer w0.254: v1(66.616,29.599) 66.664,29.599 67.263,29 69.89,29 J1.14
PC13: U6.2
PC14: U6.3
PC15: U6.4
RESET: C6.1 R8.1 S1.2 U6.7 | length 42.1
  Top Layer w0.254: C6.1 15.15,47 18.268,47 ; v1(17.5,48.5) 17.599,48.401 17.599,47.669 18.268,47 ; U6.7 27.646,47 18.268,47
  Bottom Layer w0.254: S1.2@10.723,46.008 10.723,49.123 11.3,49.7 ; S1.2@10.723,52.993 10.723,50.277 11.3,49.7 ; R8.1 15.2,49.5 16.5,49.5 ; v1(17.5,48.5) 16.5,49.5 ; 11.3,49.7 12.289,49.7 12.289,49.789 14,51.5 15.5,51.5 16.5,50.5 16.5,49.5
SWCLK: P2.2 U6.37 | length 25.2
  Top Layer w0.254: U6.37 46.435,42.546 58.954,42.546 61,40.5 61,38.649 61.149,38.5 P2.2
SWDIO: P2.3 U6.34 | length 22.1
  Top Layer w0.254: U6.34 42.429,35.046 52.089,35.046 53.003,35.96 P2.3
VCC: F1.1 T1.2 | length 5.8
  Top Layer w1: T1.2 40.013,6.513 40.013,12.243 F1.1
pads on no net: J1.7 J1.8 J1.9 J1.10 P3.H U4.5 U4.6 U4.7 U5.5 U5.6 U5.7

## Polygon pours and split planes (outlines as drawn)
GND on Top Layer "NONET_L01_P000" (solid, shelved, pour order 0): 0.5,74.5 74.5,74.5 74.5,0.5 0.5,0.5
GND on Bottom Layer "NONET_L02_P001" (solid, shelved, pour order 1): 0.5,74.5 74.5,74.5 74.5,0.5 0.5,0.5

## Keep-outs
Keep-Out Layer:
  the board outline again, w0.5

## Other copper
Top Layer:
  text "www.samaneh-payesh.com" at 41.836,46.08 h0.7
Bottom Layer:
  text "Designed By @amirmat98" at 56.906,46.767 h0.7
  text "July 2021" at 52.357,45.267 h0.7

## Silkscreen, mask and mechanical layers (free items; w line width, h text height)
Top Overlay:
  text "SWD/USB" at 39.542,73.32 h1 r180
  text "USART" at 1.52,39.706 h1.5 r270
  text "LCD" at 73.48,36.244 h1.5 r90
  text "POWER" at 35.029,0.52 h1.5

## Text inside footprints (layer, text, board x,y; h text height)
P1: Top Overlay "6" at 58.008,26.104 h1.27 r90; Top Overlay "5" at 60.548,26.104 h1.27 r90; Top Overlay "2" at 58.008,16.96 h1.27 r90; Top Overlay "1" at 60.548,17.468 h1.27 r90
P2: Top Overlay "1" at 61.064,40.532 h1; Top Overlay "2" at 60.636,37.992 h1; Top Overlay "3" at 60.636,35.452 h1; Top Overlay "4" at 60.588,32.912 h1
P3: 3D Solid "PCB EDGE" at 73.548,65.413 h0.7 r270
P4: Top Overlay "2" at 71.048,20.136 h1 r90; Top Overlay "1" at 68.508,20.564 h1 r90
T1: Top Overlay "2" at 39.554,8.665 h1.27; Top Overlay "1" at 34.728,8.665 h1.27